# EAGLE board PCB route_Linda KartikaSari_13215015 (EAGLE 7.5.0)
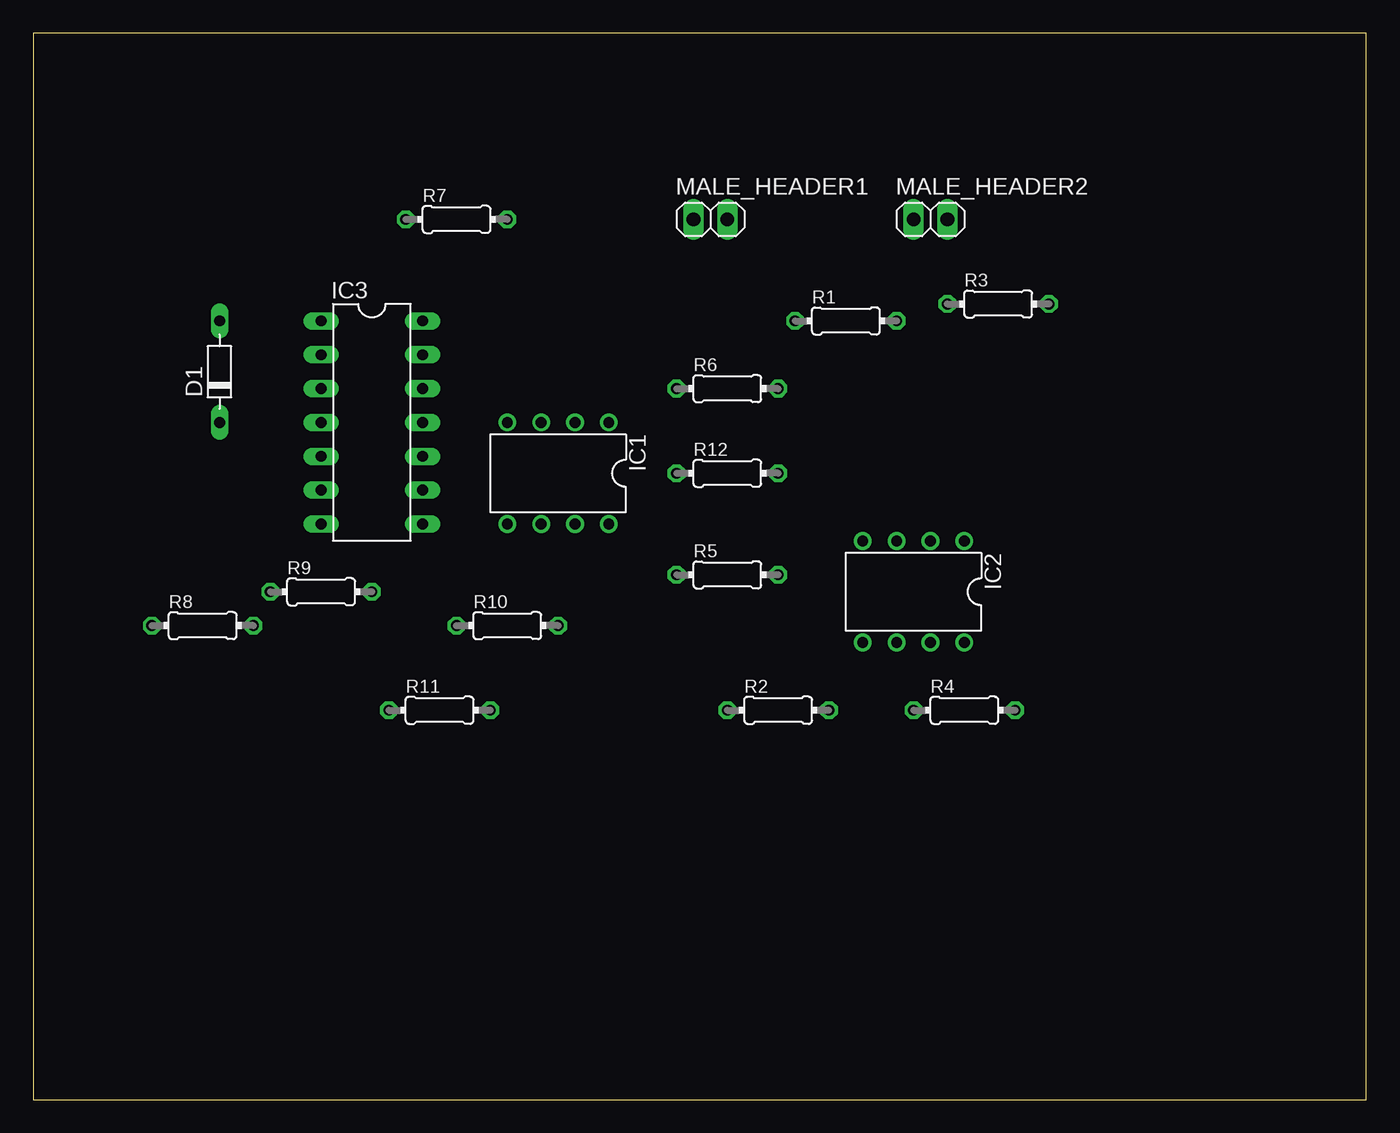
[diagram p0: board, top side]
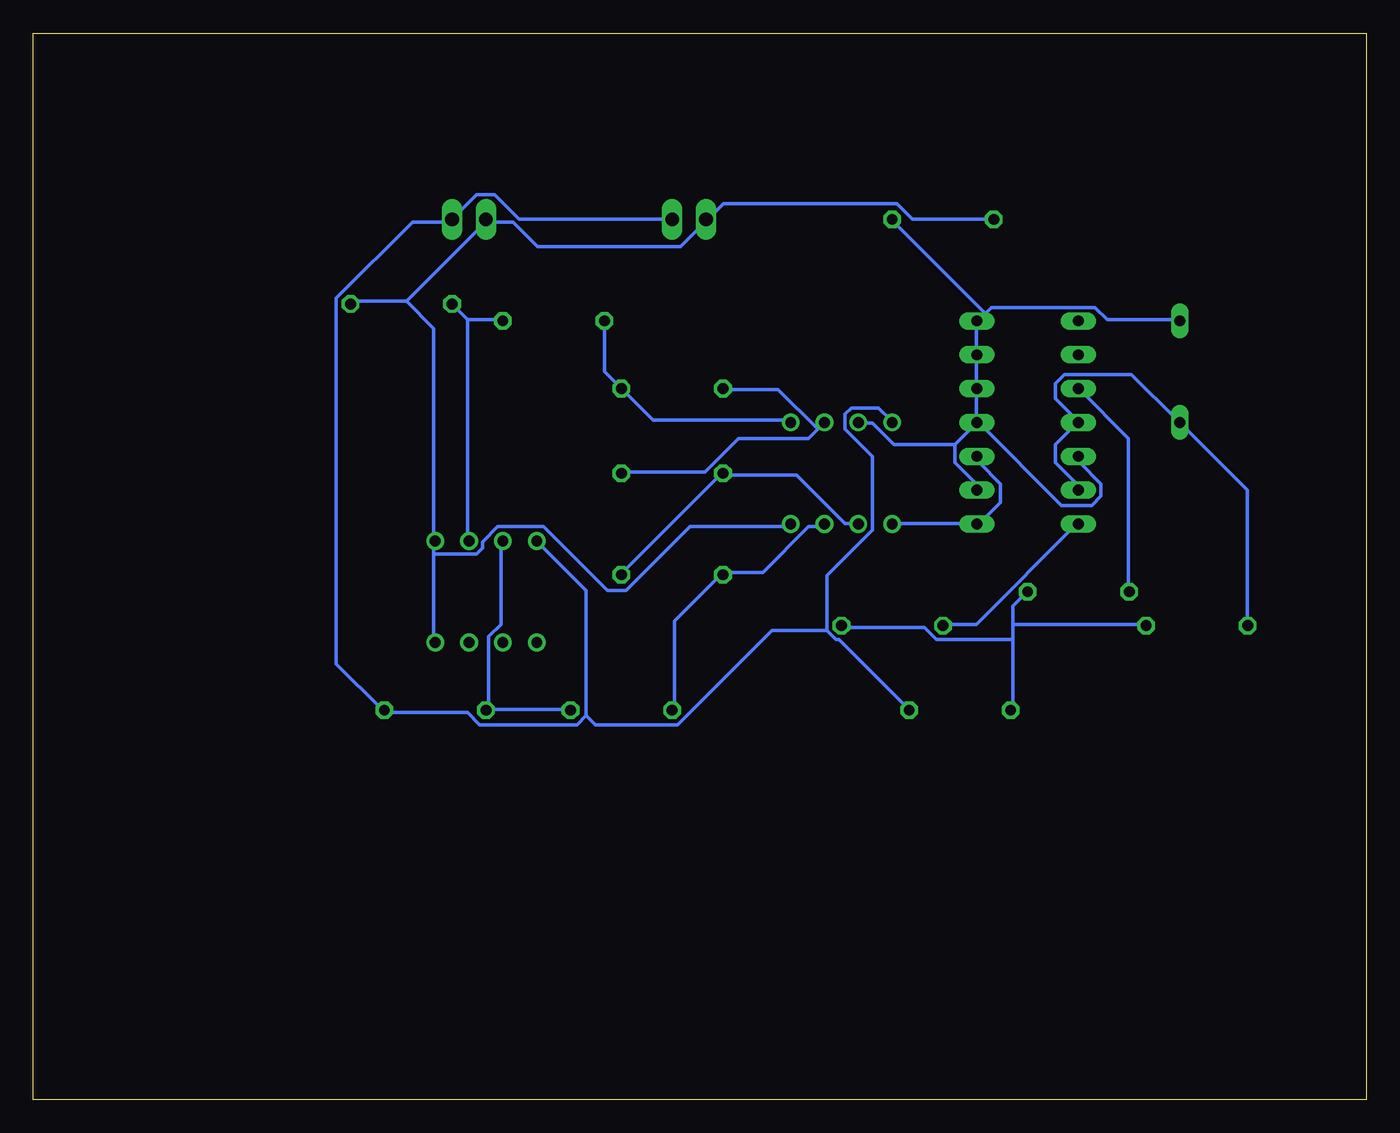
[diagram p1: board, bottom side, seen from below]

Size 100 x 80 mm. Coordinates in mm from the lower left corner, seen from the top.
Outline: 0,0 100,0 100,80 0,80 0,0
Copper layers (1*16): Top 0.035mm / dielectric 1.5mm / Bottom 0.035mm
Design rules "default *": minimum track width 10mil, minimum drill 24mil, track to track 8mil, track to pad 8mil, pad to pad 8mil, via to via 8mil, smd to smd 8mil, copper to edge 0.33mm, drill to drill 8mil, minimum pad ring 10mil, minimum via ring 8mil, stop-mask expansion 4mil, vias tented up to drill 0mil, thermal gap 10mil

## Footprints (pad centres in the part's own frame; a part is rotated, then mirrored left to right if it is on the bottom)
D-7.5 = drill 0.813 long: A 3.81,0; C -3.81,0
DIL08 = drill 0.813 pad 1.27: 1 -3.81,-3.81; 2 -1.27,-3.81; 3 1.27,-3.81; 4 3.81,-3.81; 5 3.81,3.81; 6 1.27,3.81; 7 -1.27,3.81; 8 -3.81,3.81
DIL14 = drill 0.813 long: 1 -7.62,-3.81; 2 -5.08,-3.81; 3 -2.54,-3.81; 4 0,-3.81; 5 2.54,-3.81; 6 5.08,-3.81; 7 7.62,-3.81; 8 7.62,3.81; 9 5.08,3.81; 10 2.54,3.81; 11 0,3.81; 12 -2.54,3.81; 13 -5.08,3.81; 14 -7.62,3.81
1X02 = drill 1.016 long: 1 -1.27,0; 2 1.27,0
0204/7 = drill 0.813 octagon: 1 -3.81,0; 2 3.81,0

## Placement (x,y rotation side)
D1  1N4004  [D-7.5]  13.97,54.61 90 top
IC1  LM358N  [DIL08]  39.37,46.99 180 top
IC2  LM358N  [DIL08]  66.04,38.1 180 top
IC3  CA3046  [DIL14]  25.4,50.8 270 top
MALE_HEADER1  [1X02]  50.8,66.04 0 top
MALE_HEADER2  [1X02]  67.31,66.04 0 top
R1  100k  [0204/7]  60.96,58.42 0 top
R2  100k  [0204/7]  55.88,29.21 0 top
R3  100k  [0204/7]  72.39,59.69 0 top
R4  100k  [0204/7]  69.85,29.21 0 top
R5  100k  [0204/7]  52.07,39.37 0 top
R6  300k  [0204/7]  52.07,53.34 0 top
R7  60k  [0204/7]  31.75,66.04 0 top
R8  12k  [0204/7]  12.7,35.56 0 top
R9  100k  [0204/7]  21.59,38.1 0 top
R10  200k  [0204/7]  35.56,35.56 0 top
R11  60k  [0204/7]  30.48,29.21 0 top
R12  1k  [0204/7]  52.07,46.99 0 top

## Library data of the parts
D1 = diode
IC1 IC2 = linear
IC3 = ic-package
MALE_HEADER1 MALE_HEADER2 = pinhead
R1-R12 = resistor

## Nets
AGND: IC1.4 IC2.4 MALE_HEADER1.2 MALE_HEADER2.2 R4.2 R11.2
N$1: D1.A IC1.3 IC3.5 IC3.9 IC3.11 IC3.12 IC3.13 IC3.14 R7.2
N$2: D1.C IC3.4 IC3.6 R8.1
N$3: IC3.7 R10.1
N$4: IC3.3 R9.1
N$5: R8.2 R9.2 R10.2 R11.1
N$6: IC1.5 IC3.8 IC3.10
N$7: IC1.2 R6.1 R12.2
N$8: IC1.6 R5.2 R12.1
N$9: IC1.7 R2.1 R5.1
N$10: IC2.3 R2.2 R4.1
N$11: IC1.1 R1.1 R6.2
N$12: IC2.2 R1.2 R3.1
VCC: IC1.8 IC2.1 IC2.8 MALE_HEADER1.1 MALE_HEADER2.1 R3.2 R7.1

## Tracks (layer width: path | path; a pad name or v marks a point on that pad's centre or on a via)
AGND
  Bottom 0.254: 40.46,35.2 39.78,34.52 39.55,34.52 34.29,29.26 R11.2 | 40.46,35.2 40.46,39.32 37.03,42.75 37.03,48.23 39.09,50.29 39.09,51.44 38.63,51.89 36.58,51.89 35.66,50.98 IC1.4 | MALE_HEADER1.2 52.12,66.06 63.55,66.06 65.38,67.89 66.75,67.89 68.58,66.06 MALE_HEADER2.2 68.58,65.84 71.55,65.84 77.27,60.12 77.27,32.69 73.84,29.26 R4.2 73.61,29.03 67.44,29.03 66.52,28.12 59.21,28.12 58.52,28.8 | 58.52,28.8 58.52,38.18 62.18,41.83 IC2.4 | 40.46,35.2 44.58,35.2 51.66,28.12 57.84,28.12 58.52,28.8
N$1
  Bottom 0.254: 30.86,49.15 30.86,47.78 29.26,46.18 29.26,45.72 IC3.9 | IC3.11 30.86,49.15 | IC3.5 21.49,48.23 21.49,47.78 19.89,46.18 19.89,45.26 20.57,44.58 22.86,44.58 29.03,50.75 IC3.11 | 30.86,49.15 35.43,49.15 37.03,50.75 37.95,50.75 IC1.3 | IC3.11 29.26,50.98 29.26,53.26 IC3.12 29.26,53.49 29.26,55.78 IC3.13 29.26,56.01 29.26,58.29 IC3.14 | 28.57,58.98 29.03,58.52 IC3.14 | 28.57,58.98 28.12,59.44 20.34,59.44 19.43,58.52 14.17,58.52 D1.A | 28.57,58.98 35.43,65.84 R7.2 | 28.57,58.98 IC3.14
N$2
  Bottom 0.254: IC3.6 21.72,45.72 21.72,46.18 23.32,47.78 23.32,49.15 21.72,50.75 IC3.4 21.72,50.98 23.32,52.58 23.32,53.72 22.63,54.41 17.6,54.41 14.17,50.98 D1.C 13.95,50.75 8.91,45.72 8.91,35.66 R8.1
N$3
  Bottom 0.254: R10.1 31.55,35.66 29.26,35.66 21.72,43.2 IC3.7
N$4
  Bottom 0.254: R9.1 17.83,38.18 17.83,49.61 21.49,53.26 IC3.3
N$5
  Bottom 0.254: 26.52,35.66 26.52,37.03 25.6,37.95 R9.2 | 26.52,35.66 26.52,34.52 | 26.52,34.52 26.52,29.26 R11.1 | 26.52,35.66 16.69,35.66 R8.2 | 26.52,34.52 32.23,34.52 33.15,35.43 39.32,35.43 R10.2
N$6
  Bottom 0.254: IC1.5 35.43,43.2 29.26,43.2 IC3.8 29.03,43.2 27.43,44.81 27.43,46.18 29.03,47.78 29.03,48.23 IC3.10
N$7
  Bottom 0.254: IC1.2 41.15,50.29 | 41.15,50.29 41.83,49.61 47.09,49.61 49.61,47.09 55.78,47.09 R12.2 | 41.15,50.29 44.12,53.26 48.23,53.26 R6.1
N$8
  Bottom 0.254: R5.2 55.78,39.55 48.46,46.86 R12.1 48.23,46.86 42.75,46.86 39.09,43.2 38.18,43.2 IC1.6
N$9
  Bottom 0.254: IC1.7 40.69,42.98 41.83,42.98 45.26,39.55 48.23,39.55 R5.1 48.46,39.32 51.89,35.89 51.89,29.26 R2.1
N$10
  Bottom 0.254: 65.84,29.26 59.89,29.26 R2.2 | 65.84,29.26 65.84,34.75 64.92,35.66 64.92,41.83 IC2.3 | 65.84,29.26 R4.1
N$11
  Bottom 0.254: IC1.1 43.2,50.98 53.49,50.98 55.78,53.26 R6.2 56.01,53.49 57.15,54.63 R1.1
N$12
  Bottom 0.254: 67.44,58.52 64.92,58.52 R1.2 | 67.44,58.52 68.58,59.66 R3.1 | 67.44,58.52 67.44,42.06 IC2.2
VCC
  Bottom 0.254: 69.95,40.92 69.95,41.83 IC2.1 69.95,42.06 69.95,57.84 72.01,59.89 | 69.95,40.92 69.95,34.29 IC2.8 | 69.95,40.92 66.75,40.92 66.29,41.38 66.29,41.83 65.15,42.98 61.72,42.98 56.92,38.18 55.55,38.18 50.75,42.98 43.2,42.98 IC1.8 | 72.01,59.89 76.12,59.89 R3.2 | 72.01,59.89 66.06,65.84 MALE_HEADER2.1 65.84,65.84 64.01,65.84 62.18,64.01 51.44,64.01 49.61,65.84 MALE_HEADER1.1 49.38,66.06 48.23,67.21 35.2,67.21 34.06,66.06 28.12,66.06 R7.1